# EAGLE board spi-adapter (EAGLE 6.5.0)
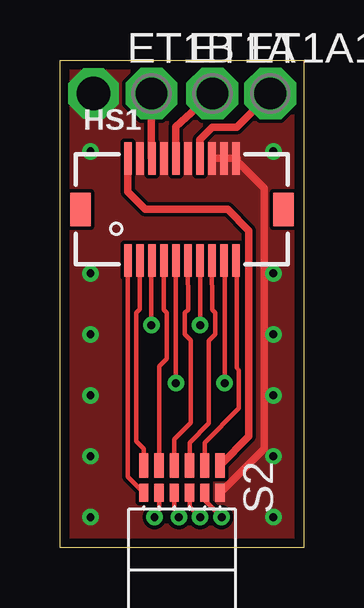
[diagram p0: board, top side]
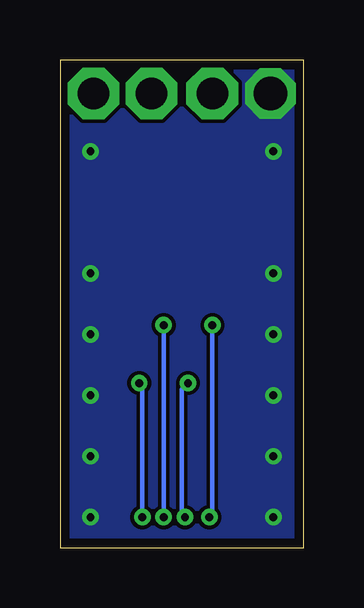
[diagram p1: board, bottom side, seen from below]

Size 10.16 x 20.32 mm. Coordinates in mm from the lower left corner, seen from the top.
Outline: 0,0 0,20.32 10.16,20.32 10.16,0 0,0
Copper layers (1*16): Top 0.0356mm / dielectric 1.5011mm / Bottom 0.0356mm
Design rules "ohs-park-2-layer": minimum track width 6mil, minimum drill 13mil, track to track 6mil, track to pad 6mil, pad to pad 6mil, via to via 6mil, smd to smd 6mil, copper to edge 15mil, drill to drill 6mil, minimum pad ring 7mil, minimum via ring 7mil, stop-mask expansion 4mil, vias tented up to drill 100mil, thermal gap 10mil

## Footprints (pad centres in the part's own frame; a part is rotated, then mirrored left to right if it is on the bottom)
P1-13 = drill 1.321 pad 2.159 octagon: TP 0,0
JMD20-V = smd 0.3 x 1.35: 1 -2.25,-2.125; 2 -1.75,-2.125; 3 -1.25,-2.125; 4 -0.75,-2.125; 5 -0.25,-2.125; 6 0.25,-2.125; 7 0.75,-2.125; 8 1.25,-2.125; 9 1.75,-2.125; 10 2.25,-2.125; 11 2.25,2.125; 12 1.75,2.125; 13 1.25,2.125; 14 0.75,2.125; 15 0.25,2.125; 16 -0.25,2.125; 17 -0.75,2.125; 18 -1.25,2.125; 19 -1.75,2.125; 20 -2.25,2.125 | smd 0.85 x 1.4: MECH1 -4.225,0; MECH2 4.225,0
OMNETICS_PZN-12-AA = smd 0.381 x 0.762: B1 1.587,-1.016; B2 0.953,-1.016; B3 0.318,-1.016; B4 -0.318,-1.016; B5 -0.953,-1.016; B6 -1.587,-1.016 | smd 0.381 x 1.016: T1 1.587,-2.159; T2 0.953,-2.159; T3 0.318,-2.159; T4 -0.318,-2.159; T5 -0.953,-2.159; T6 -1.587,-2.159

## Placement (x,y rotation side)
ET1A  TPPAD1-13  [P1-13]  6.35,18.92 0 top
ET1A1  TPPAD1-13  [P1-13]  8.76,18.92 0 top
ET1B  TPPAD1-13  [P1-13]  3.81,18.92 0 top
HS1  JMD20-V  [JMD20-V]  5.08,14.1 0 top
S2  RHD2000-CABLE-AMP-SIDE  [OMNETICS_PZN-12-AA]  5.08,1.27 180 top

## Library data of the parts
ET1A ET1A1 ET1B = testpad
HS1 = headstage
S2 = RHD2000

## Nets
AUXOUT_A1: ET1A1.TP HS1.14
CS_N: HS1.1 S2.B1
CS_P: HS1.2 S2.T1
ELEC_TEST_A1: ET1A.TP HS1.16
ELEC_TEST_B1: ET1B.TP HS1.18
GND: HS1.11 HS1.12 HS1.13 HS1.15 HS1.17 HS1.19 S2.B6
MIS02-: HS1.9 S2.B5
MISO1+: HS1.8 S2.T4
MISO1-: HS1.7 S2.B4
MISO2+: HS1.10 S2.T5
MOSI+: HS1.6 S2.T3
MOSI-: HS1.5 S2.B3
SCLK+: HS1.4 S2.T2
SCLK-: HS1.3 S2.B2
VDD: HS1.20 S2.T6

## Tracks (layer width: path | path; a pad name or v marks a point on that pad's centre or on a via)
AUXOUT_A1
  Top 0.305: HS1.14 5.83,17.01 6.35,17.53 7.37,17.53 ET1A1.TP
CS_N
  Top 0.178: S2.B1 2.83,2.95 HS1.1
CS_P
  Top 0.178: S2.T1 3.49,4.13 3.17,4.45 3.17,9.78 3.33,9.93 HS1.2
ELEC_TEST_A1
  Top 0.305: HS1.16 4.83,17.53 ET1A.TP
ELEC_TEST_B1
  Top 0.305: HS1.18 3.81,16.24 ET1B.TP
GND  (via drill 0.33, 1.4)
  Top 0.305: S2.B6 8.51,4.13 8.51,14.99 7.33,16.16 7.27,16.22 HS1.12 HS1.13
  Top 0.406: 7.33,16.16 HS1.11
  other vias: 1.4,18.92 1.27,3.81 1.27,6.35 1.27,8.89 1.27,11.43 1.27,16.51 8.89,16.51 8.89,11.43 1.27,1.27 8.89,1.27 8.89,6.35 8.89,3.81 8.89,8.89
  pour Bottom (no thermals): -2.54,27.94 17.78,27.94 17.78,0 -5.08,0 -5.08,27.94
  pour Top (no thermals): -2.29,27.94 18.03,27.94 18.03,0 -4.83,0 -4.83,27.94
MIS02-  (via drill 0.33)
  Top 0.178: S2.B5 6.03,1.97 v6.73,1.27 | v6.86,6.86 6.86,11.94 HS1.9
  Bottom 0.178: v6.73,1.27 6.73,6.73 v6.86,6.86
MISO1+
  Top 0.178: S2.T4 5.4,4.38 6.2,5.19 6.2,8.62 6.48,8.89 6.48,9.78 6.35,9.91 HS1.8
MISO1-  (via drill 0.33)
  Top 0.178: S2.B4 5.4,1.71 v5.84,1.27 | v5.84,9.27 5.84,11.96 HS1.7
  Bottom 0.178: v5.84,1.27 v5.84,9.27
MISO2+
  Top 0.178: S2.T5 6.03,4.38 7.46,5.81 7.46,7.4 7.37,7.49 7.37,11.94 HS1.10
MOSI+
  Top 0.178: S2.T3 4.76,4.51 5.46,5.2 5.46,8.64 5.21,8.89 5.21,9.78 5.33,9.91 HS1.6
MOSI-  (via drill 0.33)
  Top 0.178: S2.B3 4.76,1.59 v4.95,1.27 | v4.83,6.86 HS1.5
  Bottom 0.178: v4.95,1.27 5.08,1.4 5.08,6.6 v4.83,6.86
SCLK+
  Top 0.178: HS1.4 4.32,11.96 4.32,9.91 4.44,9.78 4.44,7.87 4.13,7.56 S2.T2
SCLK-  (via drill 0.33)
  Top 0.178: S2.B2 4.13,1.59 v3.94,1.27 | v3.81,9.27 3.81,11.95 HS1.3
  Bottom 0.178: v3.94,1.27 3.81,1.4 v3.81,9.27
VDD
  Top 0.305: S2.T6 7.87,4.64 7.87,13.21 6.98,14.1 3.56,14.1 2.83,14.82 HS1.20